# Altium PCB PCB4.PcbDoc
Units mil, origin at the board's own origin, x right, y up, seen from the top; angles counter-clockwise.
Board outline 7485 x 3940 mil, 2 copper layers (Top Layer, Bottom Layer); 60 components, 72 nets, 276 pads, 31 vias.
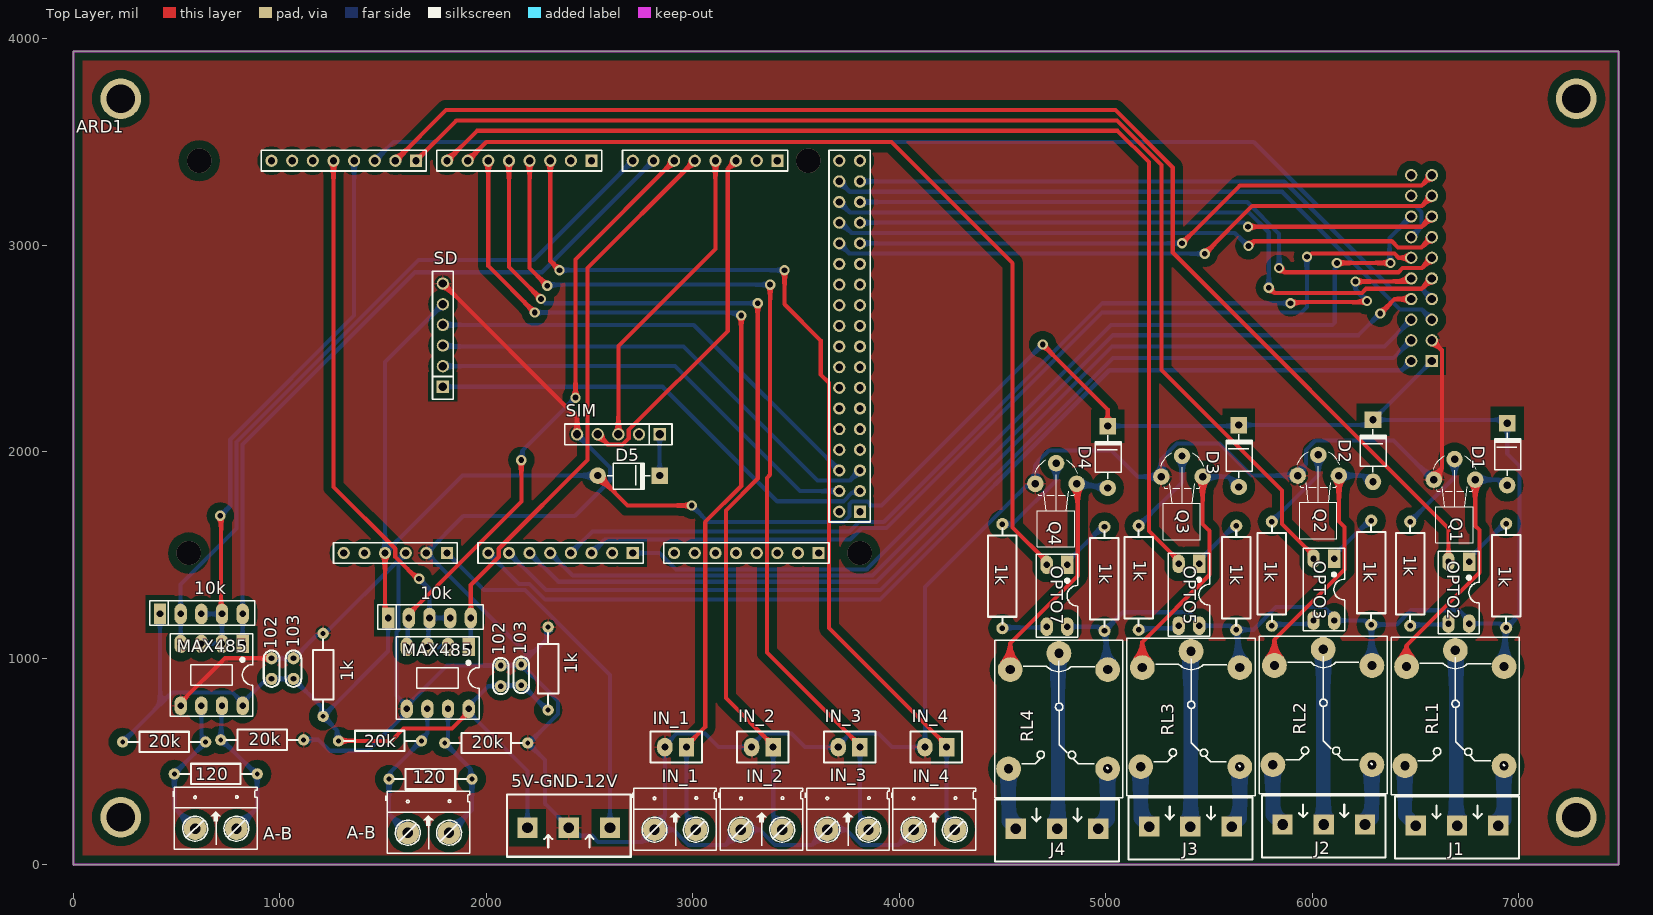
[diagram p0: Top Layer view]
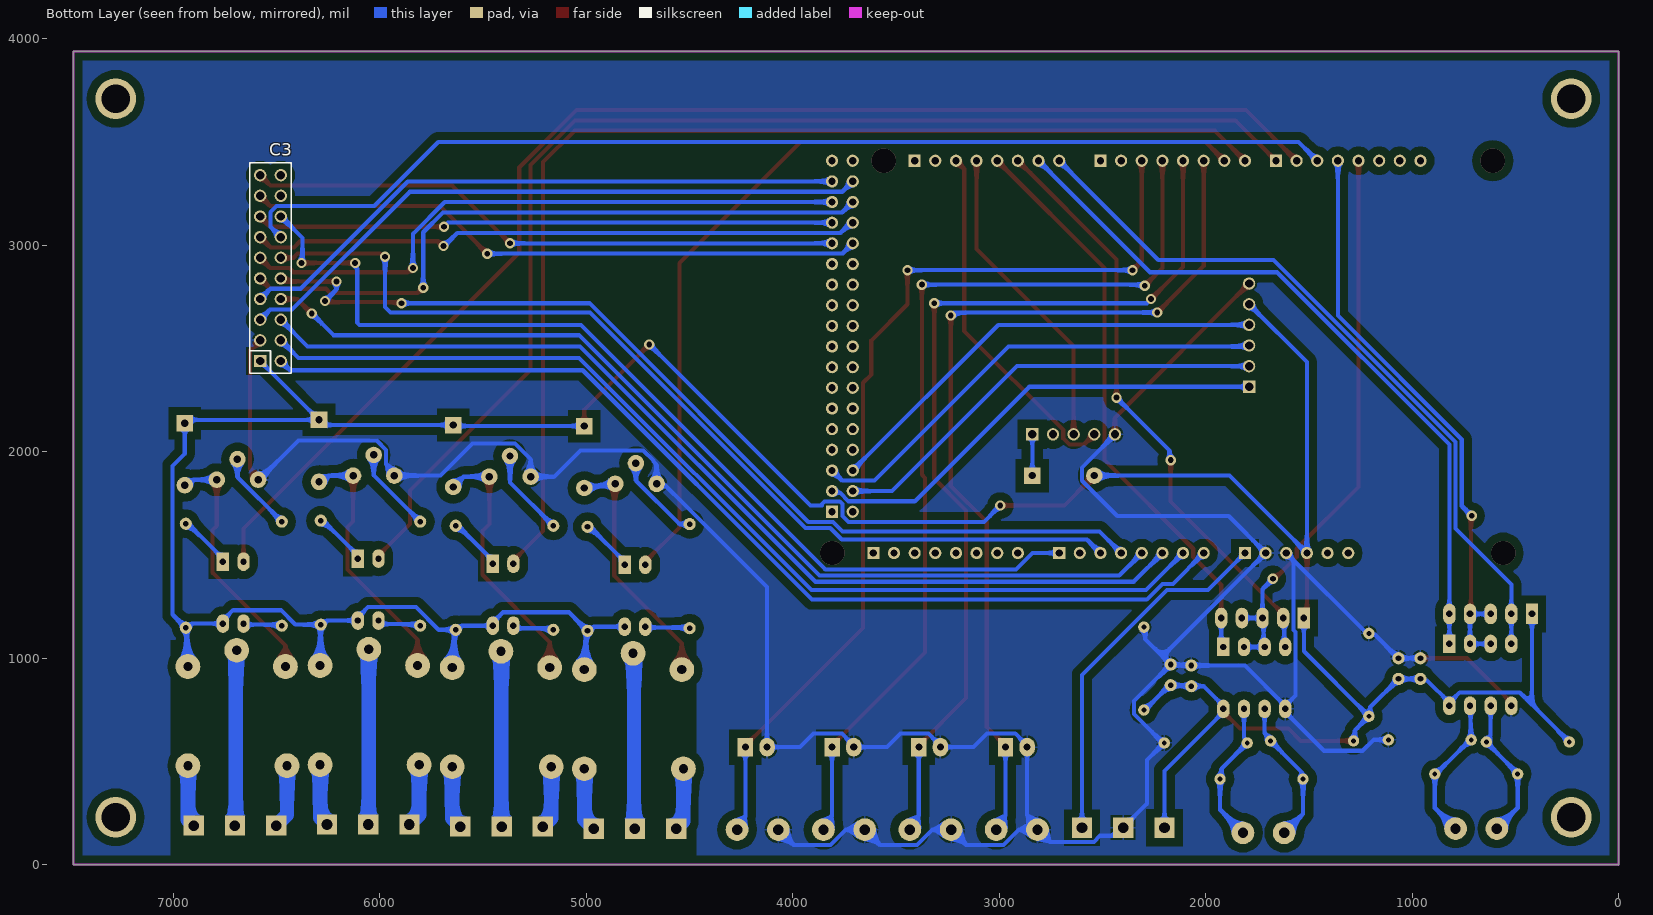
[diagram p1: Bottom Layer view, seen from below]
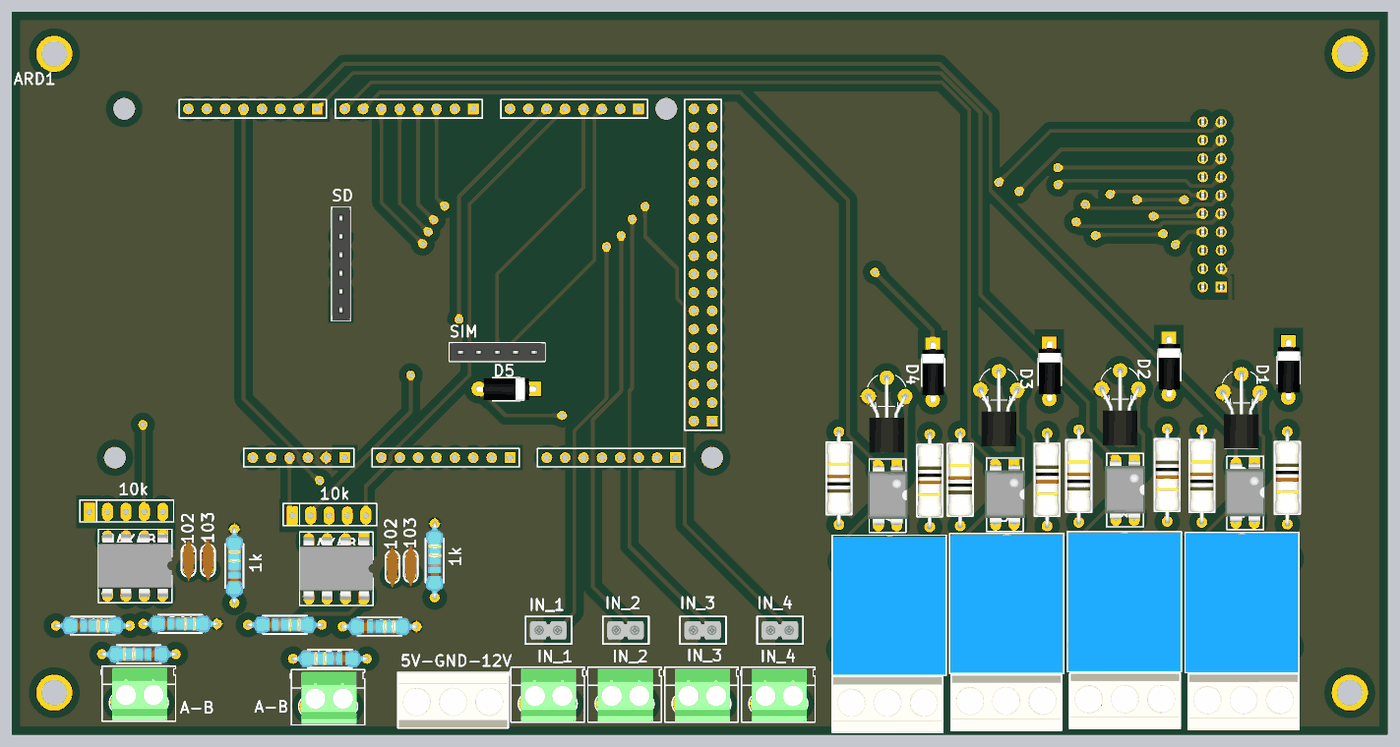
[diagram p2: 3D render of the assembled board from above, using the file's embedded part models]

## Layer stack, top to bottom
Top Solder: solder mask 0.4, Solder Resist, Dk 3.5
Top Layer: signal copper 1.4
Dielectric 1: dielectric 12.6, FR-4, Dk 4.8
Bottom Layer: signal copper 1.4
Bottom Solder: solder mask 0.4, Solder Resist, Dk 3.5

## Board outline
0,0 0,3940 7485,3940 7485,0.88

## Design rules (kind name [scope] priority, off if disabled: settings)
Clearance [All] p1: gap=40 ignorepadtopadclearanceinfootprint=FALSE
PolygonConnect [All] p1: connectstyle=Relief reliefconductorwidth=10 reliefentries=4 polygonreliefangle="90 Angle" airgapwidth=10
RoutingVias [All] p1: holewidth=28 width=50 viastyle="Through Hole" minholewidth=28 minwidth=50 maxholewidth=28 maxwidth=50
SolderMaskExpansion [All] p1: expansion=4 istentingtop=FALSE
Width [All] p1: maxlimit=70 minlimit=10 preferedwidth=20
30 further rules are at their usual default settings.

## Classes and differential pairs
component class Sheet4: 1k 5V-GND-12V 10k 20k 102 103 120 817 A-B ARD1 C3 D1 D2 D3 D4 D5 IN_1 IN_2 IN_3 IN_4 J1 J2 J3 J4 OPTO2 OPTO3 OPTO5 Q1 Q2 Q3 Q4 RL1 RL2 RL3 RL4 SD SIM

## Components (designator, comment, footprint, x,y, rotation, side; value= is the part's Value field where it differs from the comment)
1k "1k" "tro vach 1/4w" 2300,950 r270 top (schematic designator R23)
1k "1k" "tro vach 1/4w" 1210,920 r270 top (schematic designator R15)
1k "1k" "tro vach 1/2w" 4500,1398.03 r90 top (schematic designator R14)
1k "1k" "tro vach 1/2w" 4994.09,1385 r270 top (schematic designator R13)
1k "1k" "tro vach 1/2w" 5160,1390 r90 top (schematic designator R11)
1k "1k" "tro vach 1/2w" 5632.73,1390 r270 top (schematic designator R9)
1k "1k" "tro vach 1/2w" 5805,1410 r90 top (schematic designator R7)
1k "1k" "tro vach 1/2w" 6286.36,1415 r270 top (schematic designator R6)
1k "1k" "tro vach 1/2w" 6475,1410 r90 top (schematic designator R3)
1k "1k" "tro vach 1/2w" 6940,1400 r270 top (schematic designator R2)
5V-GND-12V "KF3" KF3-5.08 2200,180 r0 top (schematic designator J5)
10k "4K7" RN4 1525,1195 r0 top value="Tro thanh 4K7" (schematic designator RN2)
10k "4K7" RN4 420,1215 r0 top value="Tro thanh 4K7" (schematic designator RN1)
20k "20k" "tro vach 1/4w" 2000,590 r180 top (schematic designator R22)
20k "20k" "tro vach 1/4w" 1485,600 r180 top (schematic designator R18)
20k "20k" "tro vach 1/4w" 915,605 r180 top (schematic designator R12)
20k "20k" "tro vach 1/4w" 440,595 r180 top (schematic designator R4)
102 "102" "tu gom" 2070,915 r90 top (schematic designator C6)
102 "102" "tu gom" 960.38,950.31 r90 top (schematic designator C4)
103 "103" "tu gom" 2170,920 r90 top (schematic designator C7)
103 "103" "tu gom" 1066.38,950.31 r90 top (schematic designator C5)
120 "120R" "tro vach 1/4w" 1730,415 r0 top (schematic designator R20)
120 "120R" "tro vach 1/4w" 690,440 r0 top (schematic designator R8)
A-B "CON 2" "Con 2 KF301 5.08" 1620,155 r0 top (schematic designator KF6)
A-B "CON 2" "Con 2 KF301 5.08" 590,175 r0 top (schematic designator KF5)
ARD1 "Arduino" Arduino 2110,2510 r0 top
C3 "JP10x2" JP10-C2T 6530,2890 r90 bottom
D1 "100v" "DIODE 1A" 6945,1788.53 r270 top
D2 "100v" "DIODE 1A" 6295,1805 r270 top
D3 "100v" "DIODE 1A" 5645,1780 r270 top
D4 "100v" "DIODE 1A" 5010,1775 r270 top
D5 "100v" "DIODE 1A" 2490,1885 r180 top
IN_1 "JP" jam2 2970,570 r180 top (schematic designator JP1)
IN_1 "CON 2" "Con 2 KF301 5.08" 2815,170 r0 top (schematic designator KF1)
IN_2 "CON 2" "Con 2 KF301 5.08" 3233.33,170 r0 top (schematic designator KF2)
IN_2 "JP" jam2 3390,570 r180 top (schematic designator JP2)
IN_3 "JP" jam2 3810,570 r180 top (schematic designator JP3)
IN_3 "CON 2" "Con 2 KF301 5.08" 3651.67,170 r0 top (schematic designator KF3)
IN_4 "JP" jam2 4230,570 r180 top (schematic designator JP4)
IN_4 "CON 2" "Con 2 KF301 5.08" 4070,170 r0 top (schematic designator KF4)
J1 "KF3" KF3-5.08 6902.28,190 r180 top
J2 "KF3" KF3-5.08 6256.41,195 r180 top
J3 "KF3" KF3-5.08 5610.55,185 r180 top
J4 "KF3" KF3-5.08 4964.68,175 r180 top
MAX485 "MAX485" DIP8/W0.3 1915,1055 r180 top (schematic designator IC2)
MAX485 "MAX485" DIP8/W0.3 820,1070 r180 top (schematic designator IC1)
OPTO2 "OPTO PC817" DIP4/W0.3 6760.61,1468 r180 top value=PC817
OPTO3 "OPTO PC817" DIP4/W0.3 6106.98,1483 r180 top value=PC817
OPTO5 "OPTO PC817" DIP4/W0.3 5453.34,1458 r180 top value=PC817
OPTO7 "OPTO PC817" DIP4/W0.3 4814.7,1453 r180 top value=PC817
Q1 "KSP2222A" TO-92_Flat 6690,1865 r90 top value=NPN
Q2 "KSP2222A" TO-92_Flat 6030,1885 r90 top value=NPN
Q3 "KSP2222A" TO-92_Flat 5370,1880 r90 top value=NPN
Q4 "KSP2222A" TO-92_Flat 4760,1845 r90 top value=NPN
RL1 "Relay" "Relay 5 Chan SRD" 6693.78,1039.06 r270 top
RL2 "Relay" "Relay 5 Chan SRD" 6053.78,1044.06 r270 top
RL3 "Relay" "Relay 5 Chan SRD" 5413.78,1034.06 r270 top
RL4 "Relay" "Relay 5 Chan SRD" 4773.78,1024.06 r270 top
SD "SD" JP6-C1T 1790,2315 r90 top (schematic designator C2)
SIM "SIM" JP5-C1T 2840,2085 r180 top (schematic designator C1)

## Footprints (in the part's own frame and the unit in brackets; to place one, negate y for a bottom-side part, rotate by r counter-clockwise, add the part's x,y. Pads: shape width x height; smd on the part's side, far side on the other; paste and mask are expansions set on the pad)
Arduino [mm] "Arduino Mega 2560"
  rect 1.5x1.5 hole 0.9: 0(10.16,22.86) 8(-11.43,22.86) 21(33.02,22.86) 59(-7.62,-25.4) 67(15.24,-25.4) 75(38.1,-25.4) 79(43.18,-20.32)
  round 1.5 hole 0.9: 1(7.62,22.86) 2(5.08,22.86) 3(2.54,22.86) 4(0,22.86) 5(-2.54,22.86) 6(-5.08,22.86) 7(-7.62,22.86) 9(-13.97,22.86) 10(-16.51,22.86) 11(-19.05,22.86) 12(-21.59,22.86) 13(-24.13,22.86) 14(15.24,22.86) 15(17.78,22.86) 16(20.32,22.86) 17(22.86,22.86) 18(25.4,22.86) 19(27.94,22.86) 20(30.48,22.86) 22(40.64,20.32) 23(43.18,20.32) 24(40.64,17.78) 25(43.18,17.78) 26(40.64,15.24) 27(43.18,15.24) 28(40.64,12.7) 29(43.18,12.7) 30(40.64,10.16) 31(43.18,10.16) 32(40.64,7.62) 33(43.18,7.62) 34(40.64,5.08) 35(43.18,5.08) 36(40.64,2.54) 37(43.18,2.54) 38(40.64,0) 39(43.18,0) 40(40.64,-2.54) 41(43.18,-2.54) 42(40.64,-5.08) 43(43.18,-5.08) 44(40.64,-7.62) 45(43.18,-7.62) 46(40.64,-10.16) 47(43.18,-10.16) 48(40.64,-12.7) 49(43.18,-12.7) 50(40.64,-15.24) 51(43.18,-15.24) 52(40.64,-17.78) 53(43.18,-17.78) 54(-20.32,-25.4) 55(-17.78,-25.4) 56(-15.24,-25.4) 57(-12.7,-25.4) 58(-10.16,-25.4) 60(-2.54,-25.4) 61(0,-25.4) 62(2.54,-25.4) 63(5.08,-25.4) 64(7.62,-25.4) 65(10.16,-25.4) 66(12.7,-25.4) 68(20.32,-25.4) 69(22.86,-25.4) 70(25.4,-25.4) 71(27.94,-25.4) 72(30.48,-25.4) 73(33.02,-25.4) 74(35.56,-25.4) 76(-26.67,22.86) 77(-29.21,22.86) 78(40.64,-20.32) 80(43.18,22.86) 81(40.64,22.86)
  silkscreen extent -30.48,-26.67 44.45,24.13
"Con 2 KF301 5.08" [mil]
  round 110 hole 50: 1(0,0) 2(200,0)
  silkscreen extent -106,-100 300,200, body extent -45,-97 255,190, height 335
"DIODE 1A" [mil] "Diode 1A"
  round 80 hole 35: 1(-50,0)
  rect 80x80 hole 35: 2(-350,0)
  silkscreen extent -305,-61 -95,65, body extent -366,-61 -34,65, height 122
DIP4/W0.3 [mil] "4 PIN, W 300mil, Pin to pin 100mil"
  rect 60x90 hole 31: 1(0,0)
  oval 60x90 hole 31: 2(100,0) 3(100,300) 4(0,300)
  silkscreen extent -50,-50 150,350, body extent -59,-10 159,305, height 170
DIP8/W0.3 [mil] "8 PIN, W 300mil, Pin to pin 100mil"
  rect 60x90 hole 31: 1(0,0)
  oval 60x90 hole 31: 2(100,0) 3(200,0) 4(300,0) 5(300,300) 6(200,300) 7(100,300) 8(0,300)
  silkscreen extent -50,-50 350,350, body extent -50,-40 350,336, height 201
jam2 [mil]
  rect 75x90 hole 34: 1(0,0)
  oval 75x90 hole 34: 2(105,0)
  silkscreen extent -75,-75 175,75, body extent -48,-50 152,50, height 704
JP5-C1T [mm] "5 row, straight, gold plating"
  rect 1.52x1.52 hole 1.02: 1(0,0)
  round 1.52 hole 1.02: 2(2.54,0) 3(5.08,0) 4(7.62,0) 5(10.16,0)
  silkscreen extent -1.52,-1.27 11.68,1.27, body extent -1.52,-1.25 11.68,1.25, height 8.51
JP6-C1T [mm] "6 row, straight, gold plating"
  rect 1.52x1.52 hole 1.02: 1(0,0)
  round 1.52 hole 1.02: 2(2.54,0) 3(5.08,0) 4(7.62,0) 5(10.16,0) 6(12.7,0)
  silkscreen extent -1.52,-1.27 14.22,1.27, body extent -1.52,-1.25 14.22,1.25, height 8.51
JP10-C2T [mm] "20 pins, dual row, straight, gold plating"
  rect 1.52x1.52 hole 1.02: 1(-11.43,1.27)
  round 1.52 hole 1.02: 2(-8.89,1.27) 3(-6.35,1.27) 4(-3.81,1.27) 5(-1.27,1.27) 6(1.27,1.27) 7(3.81,1.27) 8(6.35,1.27) 9(8.89,1.27) 10(11.43,1.27) 11(11.43,-1.27) 12(8.89,-1.27) 13(6.35,-1.27) 14(3.81,-1.27) 15(1.27,-1.27) 16(-1.27,-1.27) 17(-3.81,-1.27) 18(-6.35,-1.27) 19(-8.89,-1.27) 20(-11.43,-1.27)
  silkscreen extent -12.95,-2.54 12.95,2.54, body extent -12.95,-2.54 12.95,2.54, height 8.51
KF3-5.08 [mm]
  rect 2.5x2.5 hole 1.3: 1(0,0) 2(5.08,0) 3(10.147,0)
  silkscreen extent -2.54,-3.58 12.7,4.06, body extent -2.42,-3.51 12.58,3.99, height 10
"Relay 5 Chan SRD" [mil] "Relay SPDT, 5 pin, 10A,W 650mil, L 800mil, H 800mil"
  round 120 hole 45: 1(0,0) 2(559.06,236.22) 3(559.06,-243.78) 4(78.74,-236.22) 5(78.74,236.22)
  silkscreen extent -63,-311 700,310, body extent -55,-306 697,304, height 602
RN4 [mil] "R SIP5, 5 Pin"
  rect 60x100 hole 32: 1(0,0)
  oval 60x100 hole 32: 2(100,0) 3(200,0) 4(300,0) 5(400,0)
  silkscreen extent -50,-55 460,65
TO-92_Flat [mil]
  round 80 hole 36: 1(0,100) 2(100,0) 3(0,-100)
  silkscreen extent -305,-104 114,104, body extent -307,-110 110,110, height 142
"tro vach 1/2w" [mm]
  round 1.5 hole 0.7: 1(-6.4,0) 2(6.4,0)
  silkscreen extent -5.84,-1.75 5.84,1.75, body extent -6.62,-1.75 6.62,1.75, height 3.5
"tro vach 1/4w" [mm]
  round 1.4 hole 0.6: 1(-5.1,0) 2(5.1,0)
  silkscreen extent -4.39,-1.25 4.42,1.25, body extent -5.38,-1.2 5.38,1.2, height 2.41
"tu gom" [mm] "Tu gom mini"
  round 1.5 hole 0.7: 1(-1.27,0) 2(1.27,0)
  silkscreen extent -2.25,-0.97 2.22,0.97, body extent -2.92,-0.85 2.92,0.85, height 6.12

## Part data
1k 1k: library part "Tro Vach 1/4W 5% 1k", "Cắm", Chung_Loai=Cắm, Don_Vi=Con, Ma_Hang=MH007390, So_Chan=2, Ten_Linh_Kien="Trở Vạch 1/4w 5% 1k"
1k 1k 1k 1k 1k 1k 1k 1k: library part "Tro Vach 1/2W 5% 1k", "Cắm", Chung_Loai=Cắm, Don_Vi=Con, Ma_Hang=MH007240, So_Chan=2, Ten_Linh_Kien="Trở 5% 1/2w 1K"
5V-GND-12V J1 J2 J3 J4: Manufacturer="Würth Elektronik eiSos GmbH", partNo=691103110003, ComponentLink1 Description=Manufacturer, ComponentLink1URL=http://www.we-online.com, ComponentLink2 Description=Datasheet, ComponentLink2URL=http://katalog.we-online.de/em/datasheet/6911031100xx.pdf, Created by="Karrer Zheng", Created Date="29 October 2013", NoPins=3
10k 10k: library part RN4, "Resistor 4 (thanh)"
20k 20k 20k 20k: library part "Tro Vach 1/4W 5% 20k", "Cắm", Chung_Loai=Cắm, Don_Vi=Con, Ma_Hang=MH007297, So_Chan=2, Ten_Linh_Kien="Trở Vạch 1/4w 5% 20k"
102 102: library part "Tu gom 102 50V", "Cắm", Chung_Loai=Cắm, Don_Vi=Con, Ma_Hang=MH004763, So_Chan=2, Ten_Linh_Kien="Tụ gốm 102 1nF 50V"
103 103: library part "Tu gom 103 50V", "Cắm", Chung_Loai=Cắm, Don_Vi=Con, Ma_Hang=MH000936, So_Chan=2, Ten_Linh_Kien="Tụ gốm 103 10nF 50V"
120 120: library part "Tro Vach 1/4W 5% 120R", "Cắm", Chung_Loai=Cắm, Don_Vi=Con, Ma_Hang=MH007388, So_Chan=2, Ten_Linh_Kien="Trở Vạch 1/4W 5% 120R"
A-B A-B IN_1 IN_2 IN_3 IN_4: library part "CON 2 KF301", "Cắm", Chung_Loai=Cắm, Don_Vi=Con, Ma_Hang=MH000987, Ten_Linh_Kien="CON 2 KF301-2P 5.08MM Xanh Dương"
C3: "WR-PHD 2.54 mm Dual Socket Header", Manufacturer="W¨¹rth Elektronik eiSos GmbH", partNo=61302021821, ComponentLink1 Description=Manufacturer, ComponentLink1URL=http://www.we-online.com, ComponentLink2 Description=Datasheet, ComponentLink2URL=http://katalog.we-online.de/em/datasheet/6130xx21821.pdf, Created by="Karrer Zheng", Created Date="29 March 2013", NoPins=20
D1 D2 D3 D4 D5: library part "Diode 1N4007", "Cắm", Chung_Loai=Cắm, Don_Vi=Con, Ma_Hang=MH001063, Ten_Linh_Kien="Diode 1N4007 1A (DIP)"
IN_1 IN_2 IN_3 IN_4: library part "Jam 2", "jam 2"
MAX485 MAX485: "RS232 - RS485 (Same sn75176)"
OPTO2 OPTO3 OPTO5 OPTO7: "Single Opto"
Q1 Q2 Q3 Q4: library part NPN_KSP2222A, "Transistor SMD NPN 40V 0.6A 625mW TO-92", Manufacturer 1="Fairchild Semiconductor", Manufacturer 3="ON Semiconductor", Manufacturer Part Number 1=KSP2222ATF, Manufacturer Part Number 2=PN2222ATFR, Manufacturer Part Number 3=MPS2222ARLG, Package / Case=TO-92-3, Ratings="40V; 0.6A; 625mW", Supplier Part Number 1=KSP2222ATF-ND, Manufacturer 2="Fairchild Semiconductor", Material=Si, Mounting Type=Thru-hole, SCDType=source, Supplier 1=Digi-Key, Supplier 2=Digi-Key, Supplier 3=Digi-Key, Supplier Part Number 2=PN2222AD26ZTR-ND, Supplier Part Number 3=MPS2222ARLGOSTR-ND
RL1 RL2 RL3 RL4: library part "Relay 5 Chan SRD", "Relay 5 Chan", Ma_Hang=MH009374, Ten="Relay 5V10A SRD-05VDC-SL-C Chính Hãng"
SD: library part JP6, "WR-PHD 2.54 mm Angled Socket Header", Manufacturer="W¨¹rth Elektronik eiSos GmbH", partNo=613006143121, ComponentLink1 Description=Manufacturer, ComponentLink1URL=http://www.we-online.com, ComponentLink2 Description=Datasheet, ComponentLink2URL=http://katalog.we-online.de/em/datasheet/6130xx143121.pdf, Created by="Karrer Zheng", Created Date="29 March 2013", NoPins=06
SIM: library part JP5, "WR-PHD 2.54 mm Angled Socket Header", Manufacturer="W¨¹rth Elektronik eiSos GmbH", partNo=613005143121, ComponentLink1 Description=Manufacturer, ComponentLink1URL=http://www.we-online.com, ComponentLink2 Description=Datasheet, ComponentLink2URL=http://katalog.we-online.de/em/datasheet/6130xx143121.pdf, Created by="Karrer Zheng", Created Date="29 March 2013", NoPins=05

## Free pads (board coordinates)
  round 196.85 hole 137.8: 8(7280,3710) 9(7280,230) 10(230,230) 11(230,3710)

## Via types
v1: diameter 50, hole 28, Top Layer to Bottom Layer, 27 vias
v2: diameter 118.11, hole 118.11, Top Layer to Bottom Layer, 4 vias

## Nets (pads, with @x,y where several pads share a name; then routed paths per layer and width w, separated by ;. In a path a pad name is that pad's centre, name@x,y a point inside that pad or via, vN(x,y) a via of type N, cw(c..) or ccw(c..) an arc to the next point about the centre after c; other vN are vias at no path point)
BL: ARD1.10 C3.14 | length 5389.1
  Bottom Layer w20: ARD1.10 1550,3500 5717.43,3500 6027.35,3190.08 6500.52,3190.08 6529.92,3160.68 6529.92,3089.92 C3.14
Button: ARD1.67 C3.13 | length 4751
  Top Layer w20: v1(6120,2915) v1(6380,2915)
  Bottom Layer w20: ARD1.67 2839.96,1510 2919.01,1430.94 3842.75,1430.94 5026.8,2615 6098.28,2615 6110,2626.72 6110,2886.88 6120,2896.88 v1(6120,2915) ; v1(6380,2915) 6375,2920 6375,3035 C3.13
D4: ARD1.62 C3.18 | length 4853.3
  Bottom Layer w20: ARD1.62 2349.06,1370.94 3890.94,1370.94 5030,2510 6350,2510 C3.18
D5: ARD1.63 C3.17 | length 4769.8
  Top Layer w20: v1(6330,2670) 6400,2740 C3.17
  Bottom Layer w20: ARD1.63 2419.06,1400.94 3870.94,1400.94 5035,2565 6225,2565 v1(6330,2670)
D6: ARD1.64 C3.16 | length 4755
  Top Layer w20: v1(5895,2720) 5900.12,2725.12 6260.48,2725.12 v1(6265.6,2730.24) ; v1(6210,2825) 6465,2825 C3.16
  Bottom Layer w20: ARD1.64 2515,1615 3760,1615 3805.47,1660.47 3925.47,1660.47 4985,2720 v1(5895,2720) ; v1(6210,2825) 6210,2785.84 v1(6265.6,2730.24)
D7: ARD1.65 C3.15 | length 4721.4
  Top Layer w20: v1(5975,2945) 5983.12,2945 5998.12,2960 6398.64,2960 6418.64,2940 C3.15
  Bottom Layer w20: ARD1.65 2575,1575 3763.2,1575 3818.67,1630.47 3937.9,1630.47 4982.43,2675 5948.28,2675 5975,2701.72 v1(5975,2945)
EN: ARD1.61 C3.19 | length 4945.8
  Bottom Layer w20: ARD1.61 2290,1330 3910,1330 5035,2455 6395,2455 C3.19
GND: 1k.1@1210,1120.79 1k.1@2300,1150.79 5V-GND-12V.2 20k.1@1115.79,605 20k.1@2200.79,590 102.2 103.2 ARD1.57 ARD1.58 C3.2 IN_1.1@2815,170 IN_1.2@2865,570 IN_2.1@3233.33,170 IN_2.2@3285,570 IN_3.1@3651.67,170 IN_3.2@3705,570 IN_4.1@4070,170 IN_4.2@4125,570 MAX485.5 Q1.1 Q2.1 Q3.1 Q4.1 SD.6 SIM.5 | length 16159.8
  Top Layer w20: MAX485.5@520,770 520,785 735.31,1000.31 102.2@960.38,1000.31 ; SD.6 2440,2165 SIM.5 ; C3.2 6629.92,2490.08 6629.92,1921.16 6590,1881.24 Q1.1
  Bottom Layer w20: 102.2@960.38,1000.31 1066.38,1000.31 1180.14,1114.07 1203.28,1114.07 1210,1120.79 1219.5,1120.79 1234.81,1136.09 1236.09,1136.09 1575,1475 ; 20k.1@1115.79,605 1188.32,605 1240.88,552.44 1427.44,552.44 1615,740 1615,755 MAX485.5@1615,770 ; ARD1.57 1575,1475 ; 1k.1@2300,1150.79 2293.28,1144.07 2293.28,1093.28 2210,1010 ; SIM.5 2600,1925 2600,1860.15 2428.66,1688.81 1888.81,1688.81 ARD1.58 2125.21,1094.79 2210,1010 ; IN_4.1@4070,170 3995,95 3816.88,95 3741.88,170 3651.67,170 3576.67,95 3398.54,95 3323.54,170 3233.33,170 3158.33,95 2980.21,95 2905.21,170 IN_1.1@2815,170 ; Q1.1 6585,1865 6395,2055 6015.15,2055 5970,2009.85 5970,1941.24 5930,1901.24 Q2.1 5706.96,1885 5551.96,2040 5345.15,2040 5270,1964.85 Q3.1 5155,1880 5028.28,2006.72 4724.44,2006.72 4675,1957.28 4675,1952.43 4660,1937.43 Q4.1 4648.52,1833.52 4613.48,1833.52 4531.97,1752.02 4125,1345.04 4125,570 3964.4,570 3899.4,635 3762.5,635 3705,577.5 3705,570 3544.4,570 3479.4,635 3342.5,635 3285,577.5 3285,570 3124.4,570 3059.4,635 2922.5,635 2865,577.5 2865,570 2865,240.21 2815,190.21 IN_1.1@2815,170 ; 1575,1475 1575,1465 1575,1136.72 1565,1126.72 1565,820 MAX485.5@1615,770 ; MAX485.5@1615,770 1810,965 2070,965 2072.5,967.5 2167.5,967.5 103.2@2170,970 ; 103.2@2170,970 2210,1010 ; 103.2@2170,970 2347.56,792.44 2347.56,729.51 2208.05,590 2200.79,590 2284.15,506.64 2284.15,295.85 2439.21,140.79 2512,140.79 2542,110.79 2754,110.79 2813.22,170 IN_1.1@2815,170
IN_1: ARD1.5 IN_1.1@2970,570 IN_1.2@3015,170 | length 4452.8
  Top Layer w20: ARD1.5 2010,2900 v1(2235,2675) ; IN_1.1@2970,570 2970,577.5 3060.47,667.97 3060.47,1659.25 3235,1833.78 v1(3235,2660)
  Bottom Layer w20: v1(2235,2675) 3220,2675 v1(3235,2660) ; IN_1.1@2970,570 2970,239.35 3015,194.35 IN_1.2@3015,170
IN_2: ARD1.4 IN_2.1@3390,570 IN_2.2@3433.33,170 | length 4519.5
  Top Layer w20: ARD1.4 2110,2895 v1(2265,2740) ; v1(3315,2720) 3315,1871.35 3160.47,1716.82 3160.47,807.03 3390,577.5 IN_2.1@3390,570
  Bottom Layer w20: v1(2265,2740) 2285,2720 v1(3315,2720) ; IN_2.1@3390,570 3390,237.69 3433.33,194.35 IN_2.2@3433.33,170
IN_3: ARD1.3 IN_3.1@3810,570 IN_3.2@3851.67,170 | length 4572.5
  Top Layer w20: ARD1.3 2210,2890 v1(2295,2805) ; v1(3375,2810) 3375,1888.92 3359.53,1873.45 3359.53,1027.97 3810,577.5 IN_3.1@3810,570
  Bottom Layer w20: v1(2295,2805) 2300,2810 v1(3375,2810) ; IN_3.1@3810,570 3810,236.02 3851.67,194.35 IN_3.2@3851.67,170
IN_4: ARD1.2 IN_4.1@4230,570 IN_4.2@4270,170 | length 4690.4
  Top Layer w20: ARD1.2 2310,2925 v1(2355,2880) ; v1(3445,2880) 3445,2715 3620,2540 3620,2375 3660.47,2334.53 3660.47,1147.03 4230,577.5 IN_4.1@4230,570
  Bottom Layer w20: v1(2355,2880) v1(3445,2880) ; IN_4.1@4230,570 4230,234.35 4270,194.35 IN_4.2@4270,170
Led_1: ARD1.22 C3.3 | length 3147.5
  Bottom Layer w20: ARD1.22 3760.47,3259.53 5855.47,3259.53 6424.92,2690.08 6529.92,2690.08 C3.3
Led_2: ARD1.23 C3.4 | length 3006.1
  Bottom Layer w20: ARD1.23 5865,3310 6384.92,2790.08 6529.92,2790.08 C3.4
Led_3: ARD1.24 C3.5 | length 3238.6
  Top Layer w20: v1(5790,2795) 5791.72,2795 5816.72,2770 6241.72,2770 6261.64,2789.92 6529.92,2789.92 C3.5
  Bottom Layer w20: ARD1.24 3760.47,3159.53 5694.11,3159.53 5790,3063.64 v1(5790,2795)
Led_4: ARD1.25 C3.6 | length 3037.1
  Top Layer w20: v1(5839.92,2890.08) 5846.56,2890.08 5866.64,2870 6418.64,2870 6438.72,2890.08 6530.08,2890.08 C3.6
  Bottom Layer w20: ARD1.25 5686.07,3210 5839.92,3056.14 v1(5839.92,2890.08)
Led_5: ARD1.26 C3.7 | length 2959.6
  Top Layer w20: v1(5691.82,2996.82) 5695.36,2996.82 5718.54,3020 6386.07,3020 6415.99,2990.08 6530.08,2990.08 C3.7
  Bottom Layer w20: ARD1.26 3720,3110 3770.47,3059.53 5625.47,3059.53 5688.18,2996.82 v1(5691.82,2996.82)
Led_6: ARD1.27 C3.8 | length 2799
  Top Layer w20: v1(5690,3090) 6530,3090 C3.8
  Bottom Layer w20: ARD1.27 5670,3110 v1(5690,3090)
Led_7: ARD1.28 C3.9 | length 3006.7
  Top Layer w20: v1(5480,2960) 5709.92,3189.92 6529.92,3189.92 C3.9
  Bottom Layer w20: ARD1.28 3760,2960 v1(5480,2960)
Led_8: ARD1.29 C3.10 | length 2906.7
  Top Layer w20: v1(5370,3010) 5649.92,3289.92 6529.92,3289.92 C3.10
  Bottom Layer w20: ARD1.29 v1(5370,3010)
MAX485_1: 10k.3@620,1215 10k.4@720,1215 ARD1.11 MAX485.2@720,1070 MAX485.3@620,1070 | length 2811.7
  Top Layer w20: v1(712.05,1690.38) 716.02,1686.4 716.02,1218.98 10k.4@720,1215
  Bottom Layer w20: MAX485.3@620,1070 720,1070 720,1215 10k.3@620,1215 ; v1(712.05,1690.38) 760,1738.33 760,2059.85 1360,2659.85 ARD1.11
MAX485_2: 10k.3@1725,1195 10k.4@1825,1195 ARD1.12 MAX485.2@1815,1055 MAX485.3@1715,1055 | length 2757.6
  Top Layer w20: ARD1.12 1260,1830.04 1559.53,1530.51 1559.53,1490.43 1659.22,1390.74 1669.26,1390.74 v1(1675,1385)
  Bottom Layer w20: v1(1675,1385) 1725,1335 10k.3@1725,1195 ; MAX485.2@1815,1055 1715,1055 1720,1060 1720,1190 10k.3@1725,1195 ; 10k.4@1825,1195 10k.3@1725,1195
MISO: ARD1.50 SD.4 | length 2212
  Bottom Layer w20: SD.4 3005,2615 ARD1.50
MOSI: ARD1.51 SD.3 | length 2311.6
  Bottom Layer w20: SD.3 1795,2510 2955,2510 3604.53,1860.47 3760.47,1860.47 ARD1.51
NetC1_1: D5.2 SIM.1 | length 200
  Bottom Layer w20: D5.2 SIM.1
NetD1_1: D1.1 Q1.3 RL1.4 | length 1225.4
  Top Layer w20: RL1.4 6457.56,1061.67 6810.61,1414.72 6810.61,1621.44 6790,1642.05 Q1.3
  Bottom Layer w20: Q1.3 6902.29,1865 6928.76,1838.53 D1.1
NetD2_1: D2.1 Q2.3 RL2.4 | length 1248.9
  Top Layer w20: RL2.4 5817.56,1090.3 6156.98,1429.72 6156.98,1635.75 6130,1662.73 Q2.3
  Bottom Layer w20: Q2.3 6248.76,1885 6278.76,1855 D2.1
NetD3_1: D3.1 Q3.3 RL3.4 | length 1269.1
  Top Layer w20: RL3.4 5177.56,1078.94 5503.34,1404.72 5503.34,1617.57 5470,1650.91 Q3.3
  Bottom Layer w20: Q3.3 5595,1880 D3.1
NetD4_1: D4.1 Q4.3 RL4.4 | length 1195.4
  Top Layer w20: RL4.4 4537.56,1072.58 4864.7,1399.72 4864.7,1840.3 Q4.3
  Bottom Layer w20: Q4.3 4870,1835 5000,1835 D4.1
NetIC1_6: 20k.1@640.79,595 120.1@489.21,440 A-B.1@590,175 MAX485.6@620,770 | length 708.1
  Bottom Layer w20: A-B.1@590,175 489.21,275.79 489.21,440 489.21,441.71 640.79,593.29 640.79,595 640.79,604.5 620,625.29 MAX485.6@620,770
NetIC1_7: 20k.2@714.21,605 120.2@890.79,440 A-B.2@790,175 MAX485.7@720,770 | length 719.1
  Bottom Layer w20: MAX485.7@720,770 717.11,767.11 717.11,607.89 714.21,605 720,605 885,440 890.79,440 890.79,275.79 A-B.2@790,175
NetIC2_6: 20k.1@1685.79,600 120.1@1529.21,415 A-B.1@1620,155 MAX485.6@1715,755 | length 714.6
  Bottom Layer w20: A-B.1@1620,155 1529.21,245.79 1529.21,415 1535.93,421.72 1535.93,450.14 1685.79,600 1685.79,609.5 1715,638.72 MAX485.6@1715,755
NetIC2_7: 20k.2@1799.21,590 120.2@1930.79,415 A-B.2@1820,155 MAX485.7@1815,755 | length 706.9
  Bottom Layer w20: MAX485.7@1815,755 1815,615.29 1799.21,599.5 1799.21,590 1924.07,465.14 1924.07,421.72 1930.79,415 1930.79,265.79 A-B.2@1820,155
NetJ1_1: J1.1 RL1.2 | length 301.5
  Bottom Layer w70: J1.1 6930,217.72 RL1.2
NetJ1_2: J1.2 RL1.1 | length 852.6
  Bottom Layer w70: RL1.1 6698.03,1034.81 6698.03,194.25 J1.2
NetJ1_3: J1.3 RL1.3 | length 311.9
  Bottom Layer w70: RL1.3 6450,242.78 J1.3
NetJ2_1: J2.1 RL2.2 | length 303.9
  Bottom Layer w70: J2.1 6290,228.59 RL2.2
NetJ2_2: J2.2 RL2.1 | length 850.1
  Bottom Layer w70: RL2.1 6055.1,1042.74 6055.1,196.32 J2.2
NetJ2_3: J2.3 RL2.3 | length 309.4
  Bottom Layer w70: RL2.3 5810,241.91 J2.3
NetJ3_1: J3.1 RL3.2 | length 306.3
  Bottom Layer w70: J3.1 5650,224.45 RL3.2
NetJ3_2: J3.2 RL3.1 | length 850.4
  Bottom Layer w70: J3.2 5412.16,186.62 5412.16,1032.44 RL3.1
NetJ3_3: J3.3 RL3.3 | length 307
  Bottom Layer w70: RL3.3 5170,226.05 J3.3
NetJ4_1: J4.1 RL4.2 | length 308.8
  Bottom Layer w70: J4.1 5010,220.32 RL4.2
NetJ4_2: J4.2 RL4.1 | length 852.8
  Bottom Layer w70: J4.2 4769.23,179.55 4769.23,1019.51 RL4.1
NetJ4_3: J4.3 RL4.3 | length 304.6
  Bottom Layer w70: RL4.3 4530,210.18 J4.3
NetOPTO2_1: 1k.1@6940,1651.97 OPTO2.1 | length 264.4
  Bottom Layer w20: OPTO2.1 6760.61,1483 6929.58,1651.97 1k.1@6940,1651.97
NetOPTO2_3: 1k.1@6475,1158.03 OPTO2.3 | length 189.7
  Bottom Layer w20: 1k.1@6475,1158.03 6479.99,1163.02 6655.63,1163.02 OPTO2.3
NetOPTO3_1: 1k.1@6286.36,1666.97 OPTO3.1 | length 264.4
  Bottom Layer w20: OPTO3.1 6106.98,1498 6275.94,1666.97 1k.1@6286.36,1666.97
NetOPTO3_3: 1k.1@5805,1158.03 OPTO3.3 | length 212.3
  Bottom Layer w20: 1k.1@5805,1158.03 5812.47,1165.5 5989.48,1165.5 OPTO3.3
NetOPTO5_1: 1k.1@5632.73,1641.97 OPTO5.1 | length 264.4
  Bottom Layer w20: OPTO5.1 5453.34,1473 5622.3,1641.97 1k.1@5632.73,1641.97
NetOPTO5_3: 1k.1@5160,1138.03 OPTO5.3 | length 201.6
  Bottom Layer w20: 1k.1@5160,1138.03 5167.47,1145.5 5340.84,1145.5 OPTO5.3
NetOPTO7_1: 1k.1@4994.09,1636.97 OPTO7.1 | length 264.4
  Bottom Layer w20: OPTO7.1 4814.7,1468 4983.67,1636.97 1k.1@4994.09,1636.97
NetOPTO7_3: 1k.1@4500,1146.06 OPTO7.3 | length 217.6
  Bottom Layer w20: 1k.1@4500,1146.06 4503.47,1149.53 4711.23,1149.53 OPTO7.3
NetQ1_2: 1k.2@6475,1661.97 Q1.2 | length 392.1
  Bottom Layer w20: 1k.2@6475,1661.97 6690,1876.97 Q1.2
NetQ2_2: 1k.2@5805,1661.97 Q2.2 | length 416.2
  Bottom Layer w20: 1k.2@5805,1661.97 6030,1886.97 Q2.2
NetQ3_2: 1k.2@5160,1641.97 Q3.2 | length 425
  Bottom Layer w20: 1k.2@5160,1641.97 5370,1851.97 Q3.2
NetQ4_2: 1k.2@4500,1650 Q4.2 | length 431.9
  Bottom Layer w20: 1k.2@4500,1650 4549.85,1650 4760,1860.15 Q4.2
RL_1: ARD1.9 OPTO2.2 | length 6444.1
  Top Layer w20: ARD1.9 1805,3655 5047.43,3655 5325,3377.43 5325,2965 6660.61,1629.39 OPTO2.2
RL_2: ARD1.8 OPTO3.2 | length 5992.1
  Top Layer w20: ARD1.8 1855,3605 5055,3605 5270,3390 5270,2396.72 5854.53,1812.19 5854.53,1650.45 6006.98,1498 OPTO3.2
RL_3: ARD1.7 OPTO5.2 | length 5527.6
  Top Layer w20: ARD1.7 1955,3555 5058.28,3555 5209.53,3403.76 5209.53,1616.82 5353.34,1473 OPTO5.2
RL_4: ARD1.6 OPTO7.2 | length 4448.8
  Top Layer w20: ARD1.6 2000,3500 3963.28,3500 4549.53,2913.76 4549.53,1633.18 4714.7,1468 OPTO7.2
RST_LCD: ARD1.60 C3.20 | length 5041.6
  Bottom Layer w20: ARD1.60 2159.52,1360.48 2210.09,1360.48 2285.57,1285 3907.43,1285 5017.58,2395.16 6435.16,2395.16 C3.20
RX: ARD1.19 SIM.4 | length 1743.9
  Top Layer w20: SIM.4 2590,2035 2660.6,2035 2690.08,2064.48 2690.08,2105.68 3170,2585.6 3170,3370 ARD1.19
RX_1: 10k.5@820,1215 ARD1.15 MAX485.1@820,1070 | length 3524.5
  Bottom Layer w20: MAX485.1@820,1070 820,1215 820,2035 1655,2870 2270,2870 ARD1.15
RX_2: 10k.5@1925,1195 ARD1.17 MAX485.1@1915,1055 | length 2808.6
  Top Layer w20: 10k.5@1925,1195 1925,1354.96 2060.47,1490.43 2060.47,1530.51 2489.92,1959.96 2489.92,2889.92 ARD1.17
  Bottom Layer w20: MAX485.1@1915,1055 1925,1065 10k.5@1925,1195
SCK: ARD1.52 SD.2 | length 2170.6
  Bottom Layer w20: SD.2 2915,2415 3520,1810 ARD1.52
SS: ARD1.53 SD.1 | length 2270.2
  Bottom Layer w20: SD.1 2855,2315 3409.53,1760.47 3691.91,1760.47 3730.51,1760.47 3772.57,1802.53 3802.53,1802.53 ARD1.53
TX: ARD1.18 SIM.3 | length 1519.7
  Top Layer w20: SIM.3 2640,2512.61 3110,2982.61 ARD1.18
TX_1: 10k.2@520,1215 ARD1.14 MAX485.4@520,1070 | length 3573.7
  Bottom Layer w20: MAX485.4@520,1070 520,1215 520,1358.2 790,1628.2 790,2047.43 1672.57,2930 2230,2930 ARD1.14
TX_2: 10k.2@1625,1195 ARD1.16 MAX485.4@1615,1055 | length 2891.4
  Top Layer w20: 10k.2@1625,1195 1625,1215 2170,1760 v1(2170,1960) ; v1(2432.4,2262.72) 2432.4,2932.4 ARD1.16
  Bottom Layer w20: MAX485.4@1615,1055 1620,1060 1620,1190 10k.2@1625,1195 ; v1(2170,1960) 2175.74,1965.74 2175.74,2006.06 v1(2432.4,2262.72)
V_Out: 5V-GND-12V.3 ARD1.59 | length 1773
  Bottom Layer w20: ARD1.59 1989.52,1330.48 2187.57,1330.48 2599.5,918.55 5V-GND-12V.3
VCC: 1k.2@1210,719.21 1k.2@2300,749.21 1k.2@4994.09,1133.03 1k.2@5632.73,1138.03 1k.2@6286.36,1163.03 1k.2@6940,1148.03 5V-GND-12V.1 10k.1 20k.2@239.21,595 20k.2@1284.21,600 102.1 103.1 ARD1.56 C3.1 D1.2 D2.2 D3.2 D4.2 D5.1 MAX485.8 OPTO2.4 OPTO3.4 OPTO5.4 OPTO7.4 RL1.5 RL2.5 RL3.5 RL4.5 SD.5 | length 16898.4
  Top Layer w20: 20k.2@1284.21,600 1540,600 1600,660 1835,660 1915,740 MAX485.8@1915,755 ; ARD1.56 1510,1210 10k.1@1525,1195 ; D5.1 2685,1740 v1(2995,1740) ; v1(4695,2520) 5010,2205 D4.2
  Bottom Layer w20: 20k.2@239.21,595 420,775.79 ; 10k.1@420,1215 420,775.79 ; MAX485.8@820,770 MAX485.8@820,785 ; 20k.2@1284.21,600 1277.49,606.72 1277.49,651.72 1k.2@1210,719.21 ; 10k.1@1525,1195 1525,1034.21 1k.2@1210,719.21 ; SD.5 1510,2435 ARD1.56 1885,1885 D5.1 ; 5V-GND-12V.1 2200,455 1915,740 1915,755 1915,770 2010,865 2070,865 2072.5,867.5 2167.5,867.5 2170,870 2174.61,870 2295.39,749.21 1k.2@2300,749.21 ; v1(2995,1740) 3074.53,1660.47 3730.51,1660.47 3759.53,1689.49 3759.53,1747.06 3772.47,1760 3847.34,1760 3859.53,1747.81 3859.53,1740 3915,1740 v1(4695,2520) ; OPTO7.4 4963.55,1153 4983.52,1133.03 1k.2@4994.09,1133.03 ; RL4.5 5001.56,953.75 5001.56,1125.56 1k.2@4994.09,1133.03 ; D4.2 5640,2125 D3.2 6270,2130 D2.2 ; RL3.5 5640.2,965.12 5640.2,1130.56 1k.2@5632.73,1138.03 ; RL2.5 6288.18,967.13 6288.18,1161.21 1k.2@6286.36,1163.03 ; C3.1 D2.2 ; RL1.5 6935,965.31 6935,1143.03 1k.2@6940,1148.03 ; 420,775.79 479.21,835 770,835 MAX485.8@820,785 ; MAX485.8@820,785 927.83,892.83 952.91,892.83 960.38,900.31 1066.38,900.31 1203.28,763.41 1203.28,725.93 1k.2@1210,719.21 ; 1k.2@4994.09,1133.03 5084.06,1223 5403.34,1223 5453.34,1173 OPTO5.4 5602.19,1158 5622.16,1138.03 1k.2@5632.73,1138.03 ; 1k.2@5632.73,1138.03 5714.96,1138.03 5824.93,1248 6056.98,1248 6106.98,1198 OPTO3.4 6255.82,1183 6275.79,1163.03 1k.2@6286.36,1163.03 ; 1k.2@6286.36,1163.03 6409.96,1163.03 6479.93,1233 6710.61,1233 6760.61,1183 OPTO2.4 6909.46,1168 6929.43,1148.03 1k.2@6940,1148.03 ; D2.2 6928.53,2155 D1.2 6945,1991.1 7005,1931.1 7005,1213.03 1k.2@6940,1148.03
pads on no net: ARD1.0 ARD1.1 ARD1.13 ARD1.20 ARD1.21 ARD1.30 ARD1.31 ARD1.32 ARD1.33 ARD1.34 ARD1.35 ARD1.36 ARD1.37 ARD1.38 ARD1.39 ARD1.40 ARD1.41 ARD1.42 ARD1.43 ARD1.44 ARD1.45 ARD1.46 ARD1.47 ARD1.48 ARD1.49 ARD1.54 ARD1.55 ARD1.66 ARD1.68 ARD1.69 ARD1.70 ARD1.71 ARD1.72 ARD1.73 ARD1.74 ARD1.75 ARD1.76 ARD1.77 ARD1.78 ARD1.79 ARD1.80 ARD1.81 C3.11 C3.12 SIM.2
copper on no net:
  other v2: 560,1510 3810,1510 610,3410 3560,3410

## Polygon pours and split planes (outlines as drawn)
GND on Bottom Layer "Bottom-Main" (solid, remove dead copper, pour order 1): 0,3945 0,5 7490,5 7490,3925 7500,3935
GND on Top Layer "Top-Main" (solid, remove dead copper, pour order 2): 0,3940 0,0 7475,0 7495,20 7485,30 7485,3940

## Keep-outs
Keep-Out Layer:
  lines w10: 0,0 0,3940 7485,3940 7485,0.88 0.88,0.88

## Other copper
Top Layer:
  pour cut-out: 4460,5 4470,15 4470,1085 7010,1085 7010,5
Bottom Layer:
  pour cut-out: 4465,0 4465,1085 4470,1090 7015,1090 7015,5 7010,0